# EAGLE board BeagleQ-v02 (EAGLE 6.4)
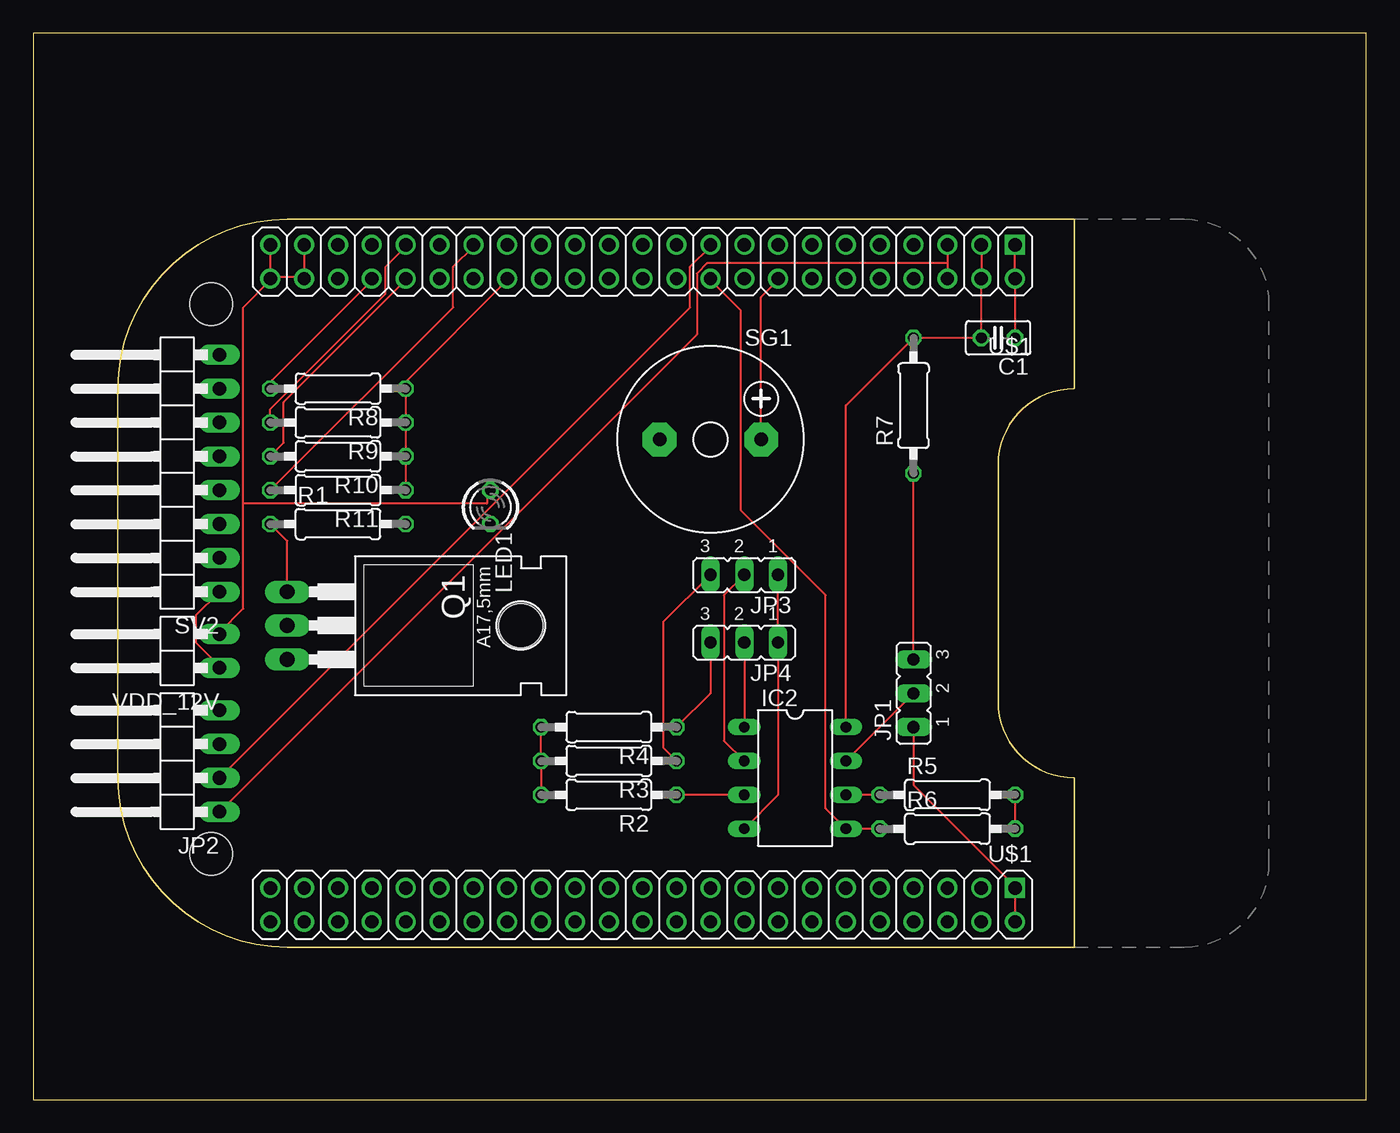
[diagram p0: board, top side]
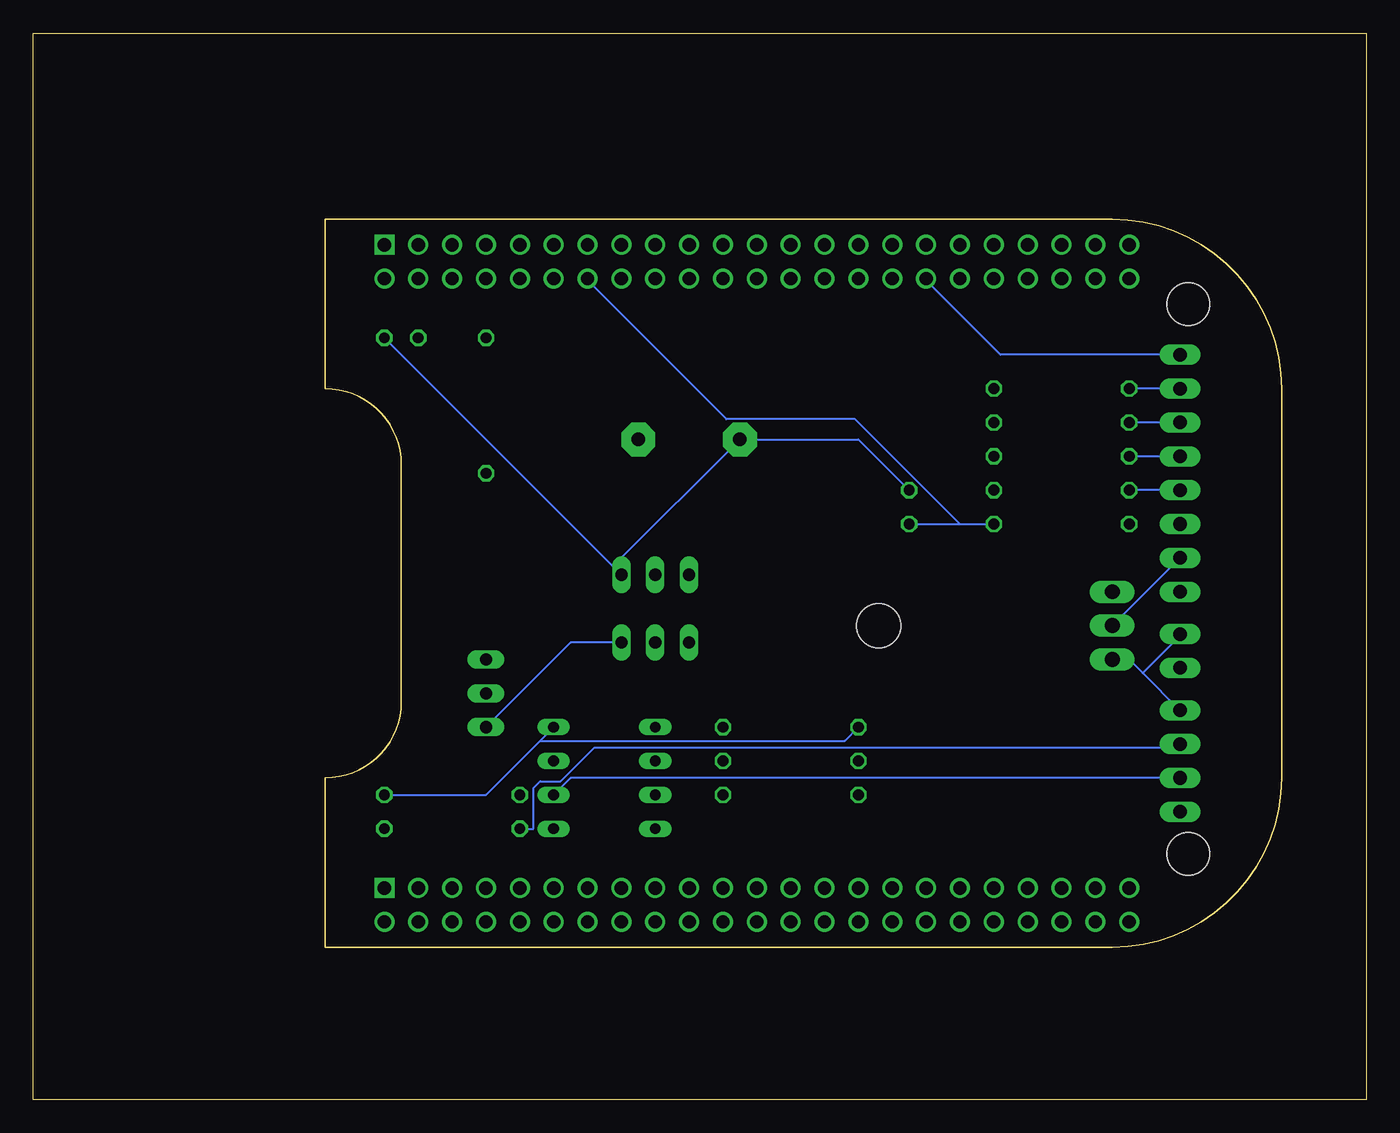
[diagram p1: board, bottom side, seen from below]

Size 100 x 80 mm. Coordinates in mm from the lower left corner, seen from the top.
Outline: 0,0 100,0 100,80 0,80 0,0
Copper layers (1*16): Top 0.0356mm / dielectric 1.5011mm / Bottom 0.0356mm
Design rules "LaenPCBOrder": minimum track width 6mil, minimum drill 13mil, track to track 6mil, track to pad 6mil, pad to pad 6mil, via to via 6mil, smd to smd 6mil, copper to edge 15mil, drill to drill 6mil, minimum pad ring 7mil, minimum via ring 7mil, stop-mask expansion 4mil, vias tented up to drill 0mil, thermal gap 10mil
Holes 3.2 mm at 13.34,18.41 13.34,59.69

## Footprints (pad centres in the part's own frame; a part is rotated, then mirrored left to right if it is on the bottom)
C025-025X050 = drill 0.813 octagon: 1 -1.27,0; 2 1.27,0
DIL08 = drill 0.813 long: 1 -3.81,-3.81; 2 -1.27,-3.81; 3 1.27,-3.81; 4 3.81,-3.81; 5 3.81,3.81; 6 1.27,3.81; 7 -1.27,3.81; 8 -3.81,3.81
JP2 = drill 0.914 long: 1 -2.54,0; 2 0,0; 3 2.54,0
1X04/90 = drill 1.016 long: 1 -3.81,-3.81; 2 -1.27,-3.81; 3 1.27,-3.81; 4 3.81,-3.81
LED3MM = drill 0.813 octagon: A -1.27,0; K 1.27,0
TO220AH = drill 1.118 long: B -2.54,-6.35; C 0,-6.35; E 2.54,-6.35 | hole 3.302: 0,11.176
0207/10 = drill 0.813 octagon: 1 -5.08,0; 2 5.08,0
F/CM12P = drill 1.016 pad 2.54 octagon: + 3.81,0; - -3.81,0
1X08/90 = drill 1.016 long: 1 -8.89,-3.81; 2 -6.35,-3.81; 3 -3.81,-3.81; 4 -1.27,-3.81; 5 1.27,-3.81; 6 3.81,-3.81; 7 6.35,-3.81; 8 8.89,-3.81
BEAGLEBONE_SHIELD = drill 1 square: 1 4.445,19.05; 47 52.705,19.05 | drill 1: 2 1.905,19.05; 3 4.445,21.59; 4 1.905,21.59; 5 4.445,24.13; 6 1.905,24.13; 7 4.445,26.67; 8 1.905,26.67; 9 4.445,29.21; 10 1.905,29.21; 11 4.445,31.75; 12 1.905,31.75; 13 4.445,34.29; 14 1.905,34.29; 15 4.445,36.83; 16 1.905,36.83; 17 4.445,39.37; 18 1.905,39.37; 19 4.445,41.91; 20 1.905,41.91; 21 4.445,44.45; 22 1.905,44.45; 23 4.445,46.99; 24 1.905,46.99; 25 4.445,49.53; 26 1.905,49.53; 27 4.445,52.07; 28 1.905,52.07; 29 4.445,54.61; 30 1.905,54.61; 31 4.445,57.15; 32 1.905,57.15; 33 4.445,59.69; 34 1.905,59.69; 35 4.445,62.23; 36 1.905,62.23; 37 4.445,64.77; 38 1.905,64.77; 39 4.445,67.31; 40 1.905,67.31; 41 4.445,69.85; 42 1.905,69.85; 43 4.445,72.39; 44 1.905,72.39; 45 4.445,74.93; 46 1.905,74.93; 48 50.165,19.05; 49 52.705,21.59; 50 50.165,21.59; 51 52.705,24.13; 52 50.165,24.13; 53 52.705,26.67; 54 50.165,26.67; 55 52.705,29.21; 56 50.165,29.21; 57 52.705,31.75; 58 50.165,31.75; 59 52.705,34.29; 60 50.165,34.29; 61 52.705,36.83; 62 50.165,36.83; 63 52.705,39.37; 64 50.165,39.37; 65 52.705,41.91; 66 50.165,41.91; 67 52.705,44.45; 68 50.165,44.45; 69 52.705,46.99; 70 50.165,46.99; 71 52.705,49.53; 72 50.165,49.53; 73 52.705,52.07; 74 50.165,52.07; 75 52.705,54.61; 76 50.165,54.61; 77 52.705,57.15; 78 50.165,57.15; 79 52.705,59.69; 80 50.165,59.69; 81 52.705,62.23; 82 50.165,62.23; 83 52.705,64.77; 84 50.165,64.77; 85 52.705,67.31; 86 50.165,67.31; 87 52.705,69.85; 88 50.165,69.85; 89 52.705,72.39; 90 50.165,72.39; 91 52.705,74.93; 92 50.165,74.93
1X02/90 = drill 1.016 long: 1 -1.27,-3.81; 2 1.27,-3.81

## Placement (x,y rotation side)
C1  [C025-025X050]  72.39,57.15 180 top
IC2  AT24CP  [DIL08]  57.15,24.13 270 top
JP1  [JP2]  66.04,30.48 90 top
JP2  [1X04/90]  10.16,25.4 90 top
JP3  [JP2]  53.34,39.37 180 top
JP4  [JP2]  53.34,34.29 180 top
LED1  [LED3MM]  34.29,44.45 270 top
Q1  TIP120  [TO220AH]  25.4,35.56 270 top
R1  2.7k  [0207/10]  22.86,43.18 0 top
R2  4.7k  [0207/10]  43.18,22.86 180 top
R3  4.7k  [0207/10]  43.18,25.4 180 top
R4  4.7k  [0207/10]  43.18,27.94 180 top
R5  5.6k  [0207/10]  68.58,22.86 0 top
R6  5.6k  [0207/10]  68.58,20.32 0 top
R7  10k  [0207/10]  66.04,52.07 90 top
R8  22k  [0207/10]  22.86,53.34 180 top
R9  22k  [0207/10]  22.86,50.8 180 top
R10  22k  [0207/10]  22.86,48.26 180 top
R11  22k  [0207/10]  22.86,45.72 180 top
SG1  F/CM12P  [F/CM12P]  50.8,49.53 0 top
SV2  Probes  [1X08/90]  10.16,46.99 90 top
U$1  BEAGLEBONE_OUTLINE  [BEAGLEBONE_SHIELD]  92.71,11.43 90 top
VDD_12V  [1X02/90]  10.16,33.66 90 top

## Library data of the parts
C1 = rcl
IC2 = atmel; MPN: AT24C1024BW-SH-B; OC_FARNELL: 1362646; OC_NEWARK: 03P2044
JP1 JP3 JP4 = jumper
JP2 SV2 VDD_12V = pinhead
LED1 = led
Q1 = transistor-power
R1-R11 = resistor
SG1 = buzzer; OC_FARNELL: unknown; OC_NEWARK: unknown
U$1 = adafruit

## Nets
AIN0: U$1.85
AIN1: R8.2 SV2.7 U$1.86
AIN2: R9.2 SV2.6 U$1.83
AIN3: R10.2 SV2.5 U$1.84
AIN4: R11.2 SV2.4 U$1.79
BLOWER_H: SV2.1 VDD_12V.1
BLOWER_L: Q1.C SV2.2
EHRPWM1A: LED1.K R1.2 U$1.60
EHRPWM1B: SG1.+ U$1.62
GND: C1.1 IC2.4 JP1.1 JP2.4 JP3.1 JP4.1 LED1.A Q1.E SG1.- U$1.1 U$1.2 U$1.47 U$1.48 U$1.89 U$1.90 U$1.91 U$1.92 VDD_12V.2
GNDA_ADC: SV2.8 U$1.80
GPIO1_28: U$1.58
I2C2_SCL: IC2.6 JP2.2 R5.1 U$1.65
I2C2_SDA: IC2.5 JP2.3 R6.1 U$1.66
N$1: IC2.2 JP3.2
N$2: IC2.1 JP4.2
N$3: IC2.7 JP1.2
N$4: Q1.B R1.1
N$5: JP1.3 R7.1
N$6: JP3.3 R3.1
N$7: JP4.3 R4.1
N$9: IC2.3 R2.1
SYS_5V: U$1.53
VDD: JP2.1 U$1.51 U$1.52
VDD_3V: C1.2 IC2.8 R2.2 R3.2 R4.2 R5.2 R6.2 R7.2 U$1.49 U$1.50
VDD_ADC: R8.1 R9.1 R10.1 R11.1 U$1.78

## Tracks (layer width: path | path; a pad name or v marks a point on that pad's centre or on a via)
AIN1
  Top 0.152: R8.2 17.78,53.85 25.4,61.47 U$1.86
  Bottom 0.152: SV2.7 R8.2
AIN2
  Top 0.152: R9.2 17.78,51.82 26.42,60.45 26.42,62.48 27.94,64.01 U$1.83
  Bottom 0.152: SV2.6 R9.2
AIN3
  Top 0.152: R10.2 18.8,49.28 18.8,52.32 27.94,61.47 U$1.84
  Bottom 0.152: SV2.5 R10.2
AIN4
  Top 0.152: R11.2 31.5,59.44 31.5,62.48 33.02,64.01 U$1.79
  Bottom 0.152: SV2.4 R11.2
BLOWER_H
  Top 0.152: SV2.1 12.19,36.32 12.19,34.29 13.97,32.51 VDD_12V.1
BLOWER_L
  Bottom 0.152: Q1.C SV2.2
EHRPWM1A
  Bottom 0.152: LED1.K 30.48,43.18 | 30.48,43.18 R1.2 | 30.48,43.18 38.35,51.05 48.01,51.05 58.42,61.47 U$1.60
EHRPWM1B
  Top 0.152: SG1.+ 54.61,60.2 55.88,61.47 U$1.62
GND
  Top 0.152: U$1.91 17.78,61.72 | U$1.89 20.32,61.72 | 20.32,61.72 17.78,61.72 | 17.78,61.72 U$1.92 17.78,61.47 15.75,59.44 15.75,44.7 | 20.32,61.72 U$1.90 | 15.75,44.7 15.75,36.83 13.97,35.05 VDD_12V.2 | C1.1 U$1.48 U$1.47 | U$1.2 U$1.1 73.66,16 66.04,23.62 JP1.1 | IC2.4 55.88,22.86 JP4.1 JP3.1 | 15.75,44.7 34.04,44.7 34.04,45.47 LED1.A
  Bottom 0.152: 16.76,32 17.78,33.02 Q1.E | 16.76,32 JP2.4 | 16.76,32 13.97,34.8 VDD_12V.2 | LED1.A 38.1,49.53 SG1.- 56.39,40.13 56.64,40.13 | JP1.1 59.69,34.29 JP4.1 | JP3.1 56.64,40.13 | 56.64,40.13 C1.1
GNDA_ADC
  Bottom 0.152: SV2.8 27.43,55.88 33.02,61.47 U$1.80
I2C2_SCL
  Top 0.152: R5.1 IC2.6 | JP2.2 49.28,59.44 49.28,62.48 50.8,64.01 U$1.65
  Bottom 0.152: IC2.6 59.69,24.13 JP2.2
I2C2_SDA
  Top 0.152: R6.1 IC2.5 59.44,21.84 59.44,37.85 53.09,44.2 53.09,59.18 50.8,61.47 U$1.66
  Bottom 0.152: JP2.3 14.22,26.42 57.91,26.42 60.45,23.88 61.98,23.88 62.48,23.37 62.48,20.32 R6.1
N$1
  Top 0.152: IC2.2 51.82,26.92 51.82,37.85 JP3.2
N$2
  Top 0.152: JP4.2 IC2.1
N$3
  Top 0.152: JP1.2 IC2.7
N$4
  Top 0.152: R1.1 19.05,41.91 Q1.B
N$5
  Top 0.152: JP1.3 R7.1
N$6
  Top 0.152: R3.1 47.24,26.42 47.24,35.81 JP3.3
N$7
  Top 0.152: R4.1 50.8,30.48 JP4.3
N$9
  Top 0.152: IC2.3 R2.1
VDD
  Top 0.152: U$1.51 68.58,62.74 | 68.58,62.74 U$1.52 | JP2.1 49.78,57.4 49.78,61.98 50.55,62.74 68.58,62.74
VDD_3V
  Top 0.152: U$1.49 U$1.50 C1.2 R7.2 60.96,52.07 IC2.8 | R2.2 R3.2 R4.2 | R5.2 R6.2
  Bottom 0.152: 61.98,26.92 66.04,22.86 R5.2 | 61.98,26.92 IC2.8 | R4.2 39.12,26.92 61.98,26.92
VDD_ADC
  Top 0.152: R11.1 R10.1 R9.1 R8.1 27.94,53.85 35.56,61.47 U$1.78

## Text on the board
tOrigins: 1 | 2 | 3 | 4 | - | A1 | + | 1 | 0 | - | A0 | WE | + | WP | SDA | SCL | BeagleQ / V2.0
bOrigins: HOUSEOFBECK / jeff@becklehimer.com